# Altium PCB PCB1.PcbDoc
Units mil, origin at the board's own origin, x right, y up, seen from the top; angles counter-clockwise.
Board outline 6000 x 4000 mil, 2 copper layers (Top Layer, Bottom Layer); 53 components, 68 nets, 248 pads, 4 vias.
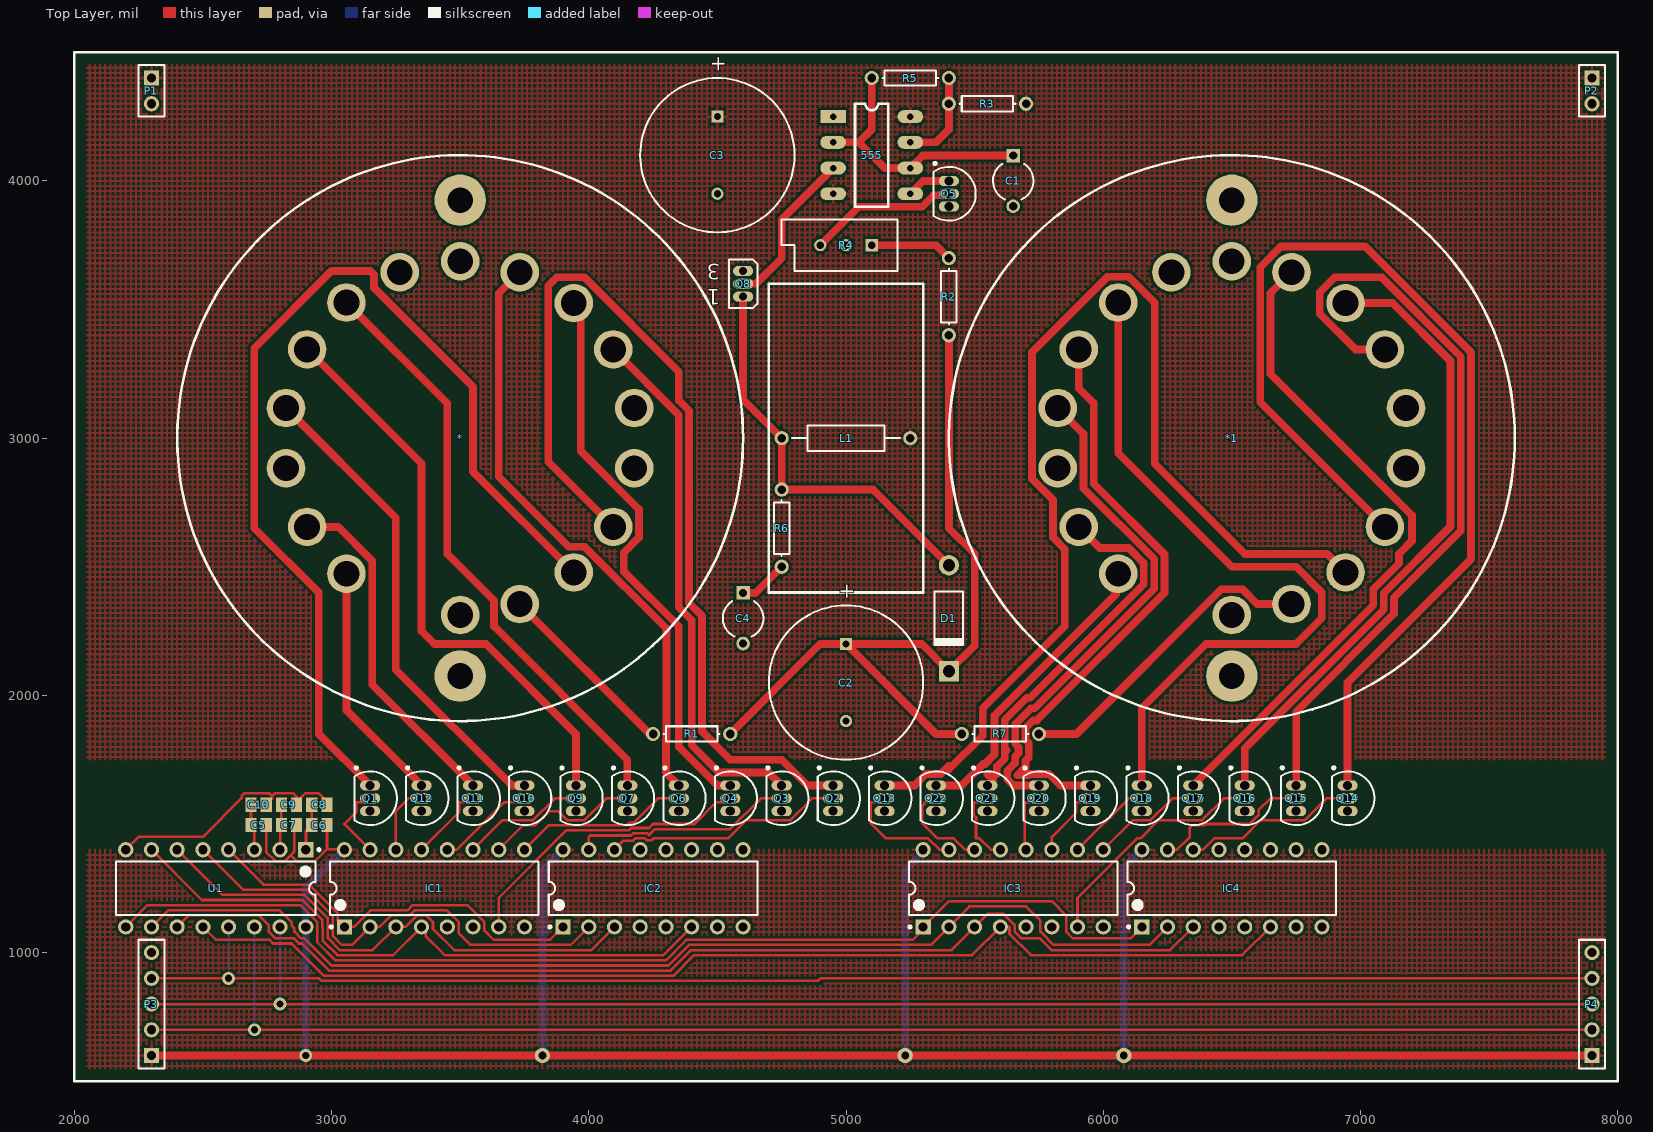
[diagram p0: Top Layer view]
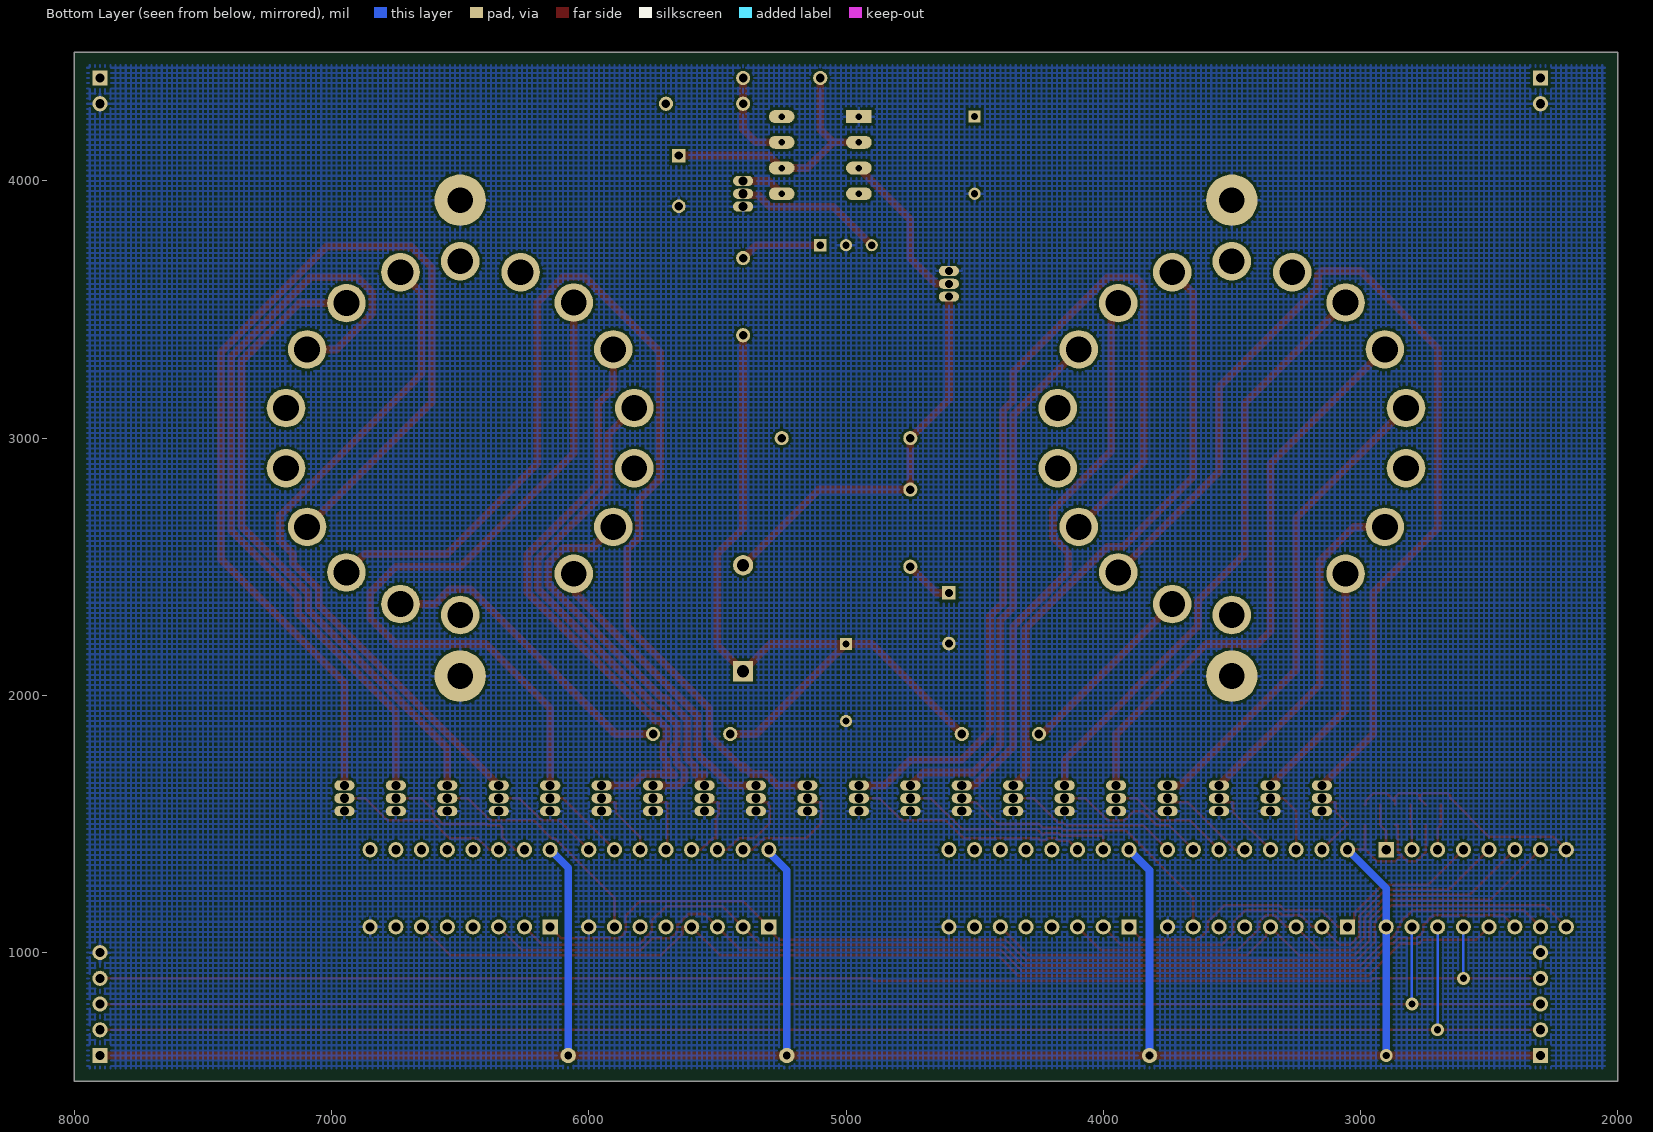
[diagram p1: Bottom Layer view, seen from below]

## Layer stack, top to bottom
Top Solder: solder mask 0.4, Solder Resist, Dk 3.5
Top Layer: signal copper 1.4
Dielectric 1: dielectric 12.6, FR-4, Dk 4.8
Bottom Layer: signal copper 1.4
Bottom Solder: solder mask 0.4, Solder Resist, Dk 3.5

## Board outline
2000,4500 8000,4500 8000,500 2000,500

## Design rules (kind name [scope] priority, off if disabled: settings)
Clearance [All] p1: gap=10 ignorepadtopadclearanceinfootprint=FALSE except(0: Arc-Hole Track-Hole SMDPad-Hole THPad-Hole Via-Hole Fill-Hole Poly-Hole Region-Hole Text-Hole)
PolygonConnect [All] p1: connectstyle=Relief reliefconductorwidth=10 reliefentries=4 polygonreliefangle="90 Angle" airgapwidth=10
RoutingVias [All] p1: holewidth=28 width=50 viastyle="Through Hole" minholewidth=28 minwidth=50 maxholewidth=28 maxwidth=50
SolderMaskExpansion [All] p1: expansion=4
Width [All] p1: maxlimit=30 minlimit=10 preferedwidth=10 minimp=50.000000 maximp=50.000000 favimp=50.000000
30 further rules are at their usual default settings.

## Components (designator, comment, footprint, x,y, rotation, side; value= is the part's Value field where it differs from the comment)
555 "555" 555 4950,4250 r0 top
* "Component_1" B8091 3500,3000 r90 top
*1 "Component_1" B8091 6500,3000 r90 top
C1 "Cap2" CAPR5-4X5 5650,4000 r270 top value=2.2nf
C2 "Cap Pol1" RB7.6-15 5000,2050 r90 top value=100pF
C3 "Cap Pol1" RB7.6-15 4500,4100 r90 top value=100pF
C4 "Cap2" CAPR5-4X5 4600,2300 r270 top value=100pf
C5 "A2+" C0805 2716.54,1496.06 r180 top
C6 "A0+" C0805 2952.76,1496.06 r180 top
C7 "A1+" C0805 2834.65,1496.06 r180 top
C8 "A0-" C0805 2952.76,1574.8 r0 top
C9 "A1-" C0805 2834.65,1574.8 r0 top
C10 "A2-" C0805 2716.54,1574.8 r0 top
D1 "Diode 1N4004" DO-41 5400,2300 r270 top
IC1 "74LS138" DIP-16 3400,1250 r90 top
IC2 "74LS138" DIP-16 4250,1250 r90 top
IC3 "74LS138" DIP-16 5650,1250 r90 top
IC4 "74LS138" DIP-16 6500,1250 r90 top
L1 "Inductor Iron" AXIAL-0.5 5000,3000 r180 top value=10mH
P1 "Header 2" HDR1X2 2300,4400 r270 top
P2 "Header 2" HDR1X2 7900,4400 r270 top
P3 "Header 5" HDR1X5 2300,600 r90 top
P4 "Header 5" HDR1X5 7900,600 r90 top
Q1 "NPN" TO-226-AA 3150,1600 r180 top
Q2 "NPN" TO-226-AA 4950,1600 r180 top
Q3 "NPN" TO-226-AA 4750,1600 r180 top
Q4 "NPN" TO-226-AA 4550,1600 r180 top
Q5 "NPN" TO-226-AA 5400,3950 r180 top
Q6 "NPN" TO-226-AA 4350,1600 r180 top
Q7 "NPN" TO-226-AA 4150,1600 r180 top
Q8 "MOSFET-N" E3 4600,3600 r180 top
Q9 "NPN" TO-226-AA 3950,1600 r180 top
Q10 "NPN" TO-226-AA 3750,1600 r180 top
Q11 "NPN" TO-226-AA 3550,1600 r180 top
Q12 "NPN" TO-226-AA 3350,1600 r180 top
Q13 "NPN" TO-226-AA 5150,1600 r180 top
Q14 "NPN" TO-226-AA 6950,1600 r180 top
Q15 "NPN" TO-226-AA 6750,1600 r180 top
Q16 "NPN" TO-226-AA 6550,1600 r180 top
Q17 "NPN" TO-226-AA 6350,1600 r180 top
Q18 "NPN" TO-226-AA 6150,1600 r180 top
Q19 "NPN" TO-226-AA 5950,1600 r180 top
Q20 "NPN" TO-226-AA 5750,1600 r180 top
Q21 "NPN" TO-226-AA 5550,1600 r180 top
Q22 "NPN" TO-226-AA 5350,1600 r180 top
R1 "Res1" AXIAL-0.3 4400,1850 r0 top value=220k
R2 "Res1" AXIAL-0.3 5400,3550 r270 top value=220k
R3 "Res1" AXIAL-0.3 5550,4300 r0 top value=1K
R4 "RPot" VR5 5000,3750 r180 top value=1K
R5 "Res1" AXIAL-0.3 5250,4400 r0 top value=10K
R6 "Res1" AXIAL-0.3 4750,2650 r90 top value=2k2
R7 "Res1" AXIAL-0.3 5600,1850 r180 top value=220k
U1 "PCF8574N" N0016A 2550,1250 r270 top

## Footprints (in the part's own frame and the unit in brackets; to place one, negate y for a bottom-side part, rotate by r counter-clockwise, add the part's x,y. Pads: shape width x height; smd on the part's side, far side on the other; paste and mask are expansions set on the pad)
555 [mil]
  rect 100x50 hole 25: 1(0,0)
  oval 100x50 hole 25: 2(0,-100) 3(0,-200) 4(0,-300) 5(300,-300) 6(300,-200) 7(300,-100) 8(300,0)
  silkscreen extent 85,-350 215,50
AXIAL-0.3 [mm] "Axial Device, Thru-Hole; 2 Leads; 0.3 in Pin Spacing"
  round 1.4 hole 0.85: 1(-3.81,0) 2(3.81,0)
  silkscreen extent -2.77,-0.76 2.77,0.76
AXIAL-0.5 [mm] "Axial Device, Thru-Hole; 2 Leads; 0.5 in Pin Spacing"
  round 1.4 hole 0.85: 1(-6.35,0) 2(6.35,0)
  silkscreen extent -5.33,-1.27 5.33,1.27
B8091 [mil] "Nixie tube"
  round 150 hole 100: 1(-687.5,0) 2(-645,-232) 3(-522,-442) 4(-345,-595) 5(-117,-677) 6(117,-677) 7(345,-595) 8(525,-442) 9(645,-232) 10(687.5,0) 11(645,235) 12(527,442) 13(345,595) 14(117,677) 15(-117,677) 16(-345,595) 17(-527,442)
  round 200 hole 100: 18(925,0) 19(-925,0)
  silkscreen extent -1100,-1100 1100,1100
C0805 [mm] "Chip Capacitor, Body 2.0x1.3mm, IPC High Density"
  rect 1.1x1.4 smd: 1(-0.75,0) 2(0.75,0)
  body extent -1.1,-0.72 1.1,0.72, height 1.4
CAPR5-4X5 [mm] "Capacitor; 2 Leads"
  rect 1.35x1.35 hole 0.8: 1(-2.5,0)
  round 1.35 hole 0.8: 2(2.5,0)
  silkscreen extent -1.69,-2 1.82,2
DIP-16 [mm] "DIP; 16 Leads; Row Spacing 7.62 mm; Pitch 2.54 mm"
  rect 1.5x1.5 hole 0.9: 1(-3.81,8.89)
  round 1.5 hole 0.9: 2(-3.81,6.35) 3(-3.81,3.81) 4(-3.81,1.27) 5(-3.81,-1.27) 6(-3.81,-3.81) 7(-3.81,-6.35) 8(-3.81,-8.89) 9(3.81,-8.89) 10(3.81,-6.35) 11(3.81,-3.81) 12(3.81,-1.27) 13(3.81,1.27) 14(3.81,3.81) 15(3.81,6.35) 16(3.81,8.89)
  silkscreen extent -3.93,-10.3 2.65,10.31, body extent -3.6,-10.28 3.6,10.28, height 5.08
DO-41 [mm] "Diode, Axial; Body 5.2 x 2.7 mm (LxDia. max), Lead Dia. 0.86 mm (max)"
  round 2 hole 1.2: 1(-5.23,0)
  rect 2x2 hole 1.2: 2(5.23,0)
  silkscreen extent -2.65,-1.4 2.75,1.4
E3 [mm] "TO, Flat Index; 3 In-Line, Axial Leads; Body Dia. 4.6mm; Lead Dia. 0.5 mm (max)"
  oval 2x1 hole 0.8: 1(0,1.27) 2(0,0) 3(0,-1.27)
  silkscreen extent -1.41,-2.41 1.41,2.41
HDR1X2 [mm] "Connector; Header; 2 Position"
  rect 1.5x1.5 hole 0.9: 1(0,0)
  round 1.5 hole 0.9: 2(2.54,0)
  silkscreen extent -1.27,-1.27 3.81,1.27
HDR1X5 [mm] "Connector; Header; 5 Position"
  rect 1.5x1.5 hole 0.9: 1(0,0)
  round 1.5 hole 0.9: 2(2.54,0) 3(5.08,0) 4(7.62,0) 5(10.16,0)
  silkscreen extent -1.27,-1.27 11.43,1.27
N0016A [mm] "DIP, 16-Leads, Body 19.7x6.6mm, Pitch 2.54mm"
  rect 1.5x1.5 hole 0.9: 1(-3.81,8.89)
  round 1.5 hole 0.9: 2(-3.81,6.35) 3(-3.81,3.81) 4(-3.81,1.27) 5(-3.81,-1.27) 6(-3.81,-3.81) 7(-3.81,-6.35) 8(-3.81,-8.89) 9(3.81,-8.89) 10(3.81,-6.35) 11(3.81,-3.81) 12(3.81,-1.27) 13(3.81,1.27) 14(3.81,3.81) 15(3.81,6.35) 16(3.81,8.89)
  silkscreen extent -3.93,-9.85 2.65,10.32, body extent -3.95,-9.85 3.95,9.85, height 5.08
RB7.6-15 [mm] "Polarized Capacitor (Radial); 2 Leads"
  rect 1.2x1.2 hole 0.7: 1(3.81,0)
  round 1.2 hole 0.7: 2(-3.81,0)
  silkscreen extent -7.62,-7.62 7.62,7.62
TO-226-AA [mm] "TO, Flat Index; 3 In-Line, Axial Leads; Body Dia. 4.8mm; Leads 0.55 x 0.51 mm (max)"
  oval 2x1 hole 0.9: 1(0,-1.27) 2(0,0) 3(0,1.27)
  silkscreen extent -2.65,-3.13 1.52,2.65, body extent -2.65,-2.66 1.52,2.66, height 5.33
VR5 [mm] "Thru-Hole; 3 Leads"
  rect 1.2x1.2 hole 0.7: 1(-2.54,0)
  round 1.2 hole 0.7: 2(0,0) 3(2.54,0)
  silkscreen extent -5.08,-2.54 6.35,2.54

## Part data
C1 C4: "Capacitor", PackageDescription="Capacitor; 2 Leads", PackageReference=CAPR5-4X5, Published=23-Sep-2002, Publisher="Altium Limited"
C2 C3: "Polarized Capacitor (Radial)", LatestRevisionDate=17-Jul-2002, LatestRevisionNote="Re-released for DXP Platform.", PackageDescription="Polarized Capacitor (Radial); 2 Leads", PackageReference=RB7.6-15, Published=8-Jun-2000, Publisher="Altium Limited"
C5 C6 C7 C8 C9 C10: library part "Cap Pol3", "Polarized Capacitor (Surface Mount)", LatestRevisionDate=29-May-2009, LatestRevisionNote="IPC-7351 Footprint Added.", PackageDescription="Chip Capacitor", PackageReference=C0805, Published=8-Jun-2000, Publisher="Altium Limited"
D1: "1 Amp General Purpose Rectifier", Code_JEDEC=DO-204-AL, ComponentLink1Description="Manufacturer Link", ComponentLink1URL=http://www.fairchildsemi.com/, ComponentLink2Description=Datasheet, ComponentLink2URL=http://www.fairchildsemi.com/ds/1N%2F1N4001.pdf, DatasheetVersion=1998, LatestRevisionDate=17-Jul-2002, LatestRevisionNote="Re-released for DXP Platform.", PackageDescription="Diode, Axial; Body 5.2 x 2.7 mm (LxDia. max), Lead Dia. 0.86 mm (max)", PackageReference=DO-41, PackageVersion=Aug-1999, Published=8-Jun-2000, Publisher="Altium Limited"
IC1 IC2 IC3 IC4: Package=None, Availability=Unavailable, MF="Texas Instruments", MP=74LS138, Price=None, SnapEDA_Link=https://www.snapeda.com/parts/74LS138/Texas%20Instruments/view-part/?ref=snap
L1: "Magnetic-Core Inductor", LatestRevisionDate=17-Jul-2002, LatestRevisionNote="Re-released for DXP Platform.", PackageDescription="Axial Device, Thru-Hole; 2 Leads; 0.9 in Pin Spacing", PackageReference=AXIAL-0.9, Published=24-Mar-1999, Publisher="Altium Limited"
P1 P2: "Header, 2-Pin", LatestRevisionDate=17-Jul-2002, LatestRevisionNote="Re-released for DXP Platform.", Publisher="Altium Limited"
P3 P4: "Header, 5-Pin", LatestRevisionDate=17-Jul-2002, LatestRevisionNote="Re-released for DXP Platform.", Publisher="Altium Limited"
Q1 Q2 Q3 Q4 Q5 Q6 Q7 Q9 Q10 Q11 Q12 Q13 Q14 Q15 Q16 Q17 Q18 Q19 Q20 Q21 Q22: "NPN Bipolar Transistor", Code_JEDEC=TO-226-AA, LatestRevisionDate=17-Jul-2002, LatestRevisionNote="Re-released for DXP Platform.", PackageDescription="TO, Flat Index; 3 In-Line, Axial Leads; Body Dia. 4.8mm; Leads 0.55 x 0.51 mm (max)", PackageReference=TO-226-AA, Published=8-Jun-2000, Publisher="Altium Limited"
Q8: "N-Channel MOSFET", LatestRevisionDate=17-Jul-2002, LatestRevisionNote="Re-released for DXP Platform.", PackageDescription="TO, Flat Index; 3 In-Line, Axial Leads; Body Dia. 4.6mm; Lead Dia. 0.5 mm (max)", PackageReference=E3, PackageVersion=1995/1996, Published=8-Jun-2000, Publisher="Altium Limited"
R1 R2 R3 R5 R6 R7: "Resistor", LatestRevisionDate=17-Jul-2002, LatestRevisionNote="Re-released for DXP Platform.", PackageDescription="Axial Device, Thru-Hole; 2 Leads; 0.3 in Pin Spacing", PackageReference=AXIAL-0.3, Published=8-Jun-2000, Publisher="Altium Limited"
R4: "Potentiometer", LatestRevisionDate=17-Jul-2002, LatestRevisionNote="Re-released for DXP Platform.", PackageDescription="Variable Resistor, Thru-Hole; 3 Leads", PackageReference=VR5, Published=8-Jun-2000, Publisher="Altium Limited", Set Position=0.5, Sim Note="Enter the Resistance value and the set point into parameter fields."
U1: library part CMP-0314-00016-2, "Remote 8-Bit I/O Expander for I2C-Bus, 2.5 to 6 V, -40 to 85 degC, 16-pin PDIP (N), Pb-Free (RoHS)", Manufacturer="Texas Instruments", Max Frequency(kHz)=100, Voltage Nodes(V)="5, 3.3", # of I/Os=8, Code_JEDEC=MS-001*, ComponentLink1Description=Datasheet, ComponentLink1URL=http://www.ti.com/general/docs/lit/getliterature.tsp?genericPartNumber=PCF8574&fileType=pdf, ComponentLink2Description="Package Specification", ComponentLink2URL=http://www.ti.com/litv/pdf/mpdi002c, DatasheetVersion=SCPS068G, Eco-Plan="Green (RoHS & no Sb/Br)", fSCLK(Max)(MHz)=0.1, I2C Address="0100 xxx", Interrupt Output=Yes, Mounting Technology=Through-hole, PackageDescription="16-Pin Plastic Dual-In-Line Package, Row Spacing 7.62 mm, Pitch 2.54 mm", PackageReference=N0016A, PackageVersion="revE, Dec-2002", PartNumber=PCF8574N, Push-Pull I/O Type=Yes, Reset Input=No, SubFamily="I2C IO Expander", VCC(Max)(V)=6, VCC(Min)(V)=2.5, Vcc range(V)="2.5 to 6.0"

## Free pads (board coordinates)
  round 60 hole 30: 2(3820,600) 3(5230,600) 4(6080,600)

## Via types
v1: diameter 50, hole 28, Top Layer to Bottom Layer, 4 vias

## Nets (pads, with @x,y where several pads share a name; then routed paths per layer and width w, separated by ;. In a path a pad name is that pad's centre, name@x,y a point inside that pad or via, vN(x,y) a via of type N, cw(c..) or ccw(c..) an arc to the next point about the centre after c; other vN are vias at no path point)
00: IC3.15 Q13.2 | length 488.6
  Top Layer w10: Q13.2 5134.69,1584.68 5095.63,1584.68 5095.63,1504.37 5155.47,1444.53 5318.44,1444.53 5362.97,1400 IC3.15
0: IC1.15 Q1.2 | length 305.7
  Top Layer w10: IC1.15 3050,1500 3095.63,1545.63 3095.63,1584.68 3134.68,1584.68 Q1.2
1: IC1.14 Q12.2 | length 270.7
  Top Layer w10: IC1.14 3250,1550 3300,1600 Q12.2
2: IC1.13 Q11.2 | length 305.7
  Top Layer w10: IC1.13 3495.63,1545.63 3495.63,1584.68 3534.68,1584.68 Q11.2
3: IC1.12 Q10.2 | length 382.8
  Top Layer w10: IC1.12 3487.03,1400 3671.71,1584.68 3734.68,1584.68 Q10.2
4: IC1.11 Q9.2 | length 482.8
  Top Layer w10: IC1.11 3665.32,1515.32 3784.05,1515.32 3868.74,1600 Q9.2
5: IC1.10 Q7.2 | length 611.6
  Top Layer w10: IC1.10 3745.32,1495.32 3792.34,1495.32 3847.02,1550 3881.26,1550 3915.95,1515.32 3984.05,1515.32 4068.74,1600 Q7.2
5V: C5.1 C6.1 C7.1 IC1.16 IC2.16 IC3.16 IC4.16 P3.1 P4.1 pad.2 pad.3 pad.4 U1.16 | length 9643.4
  Top Layer w10: C5.1 2746.06,1390.97 2781.56,1355.47 2818.44,1355.47 2842.97,1380 ; C7.1 2855.47,1496.06 2855.47,1392.5 2842.97,1380 ; C6.1 2982.28,1402.28 ; IC1.16 3047.72,1402.28 2982.28,1402.28 ; 2842.97,1380 2842.97,1376.76 2864.26,1355.47 2935.74,1355.47 2944.53,1364.26 2944.53,1364.53 2982.28,1402.28
  Top Layer w30: P3.1 v1(2900,600) pad.2 pad.3 pad.4 P4.1
  Bottom Layer w10: IC3.16@5300,1390 IC3.16
  Bottom Layer w30: v1(2900,600) U1.16 2900,1250 IC1.16 ; pad.2 3820,1320 IC2.16 ; pad.3 5230,1320 IC3.16@5300,1390 ; pad.4 6080,1330 IC4.16
6: IC1.9 Q6.2 | length 682.8
  Top Layer w10: IC1.9 3845.32,1495.32 4147.49,1495.32 4156.7,1504.53 4173.26,1504.53 4268.74,1600 Q6.2
7: IC1.7 Q4.2 | length 1173.3
  Top Layer w10: IC1.7 3650,1212.97 3912.34,1475.32 4155.78,1475.32 4164.99,1484.53 4234.53,1484.53 4250,1500 4410.94,1500 4495.63,1584.68 4534.69,1584.68 Q4.2
8: IC2.15 Q3.2 | length 868.8
  Top Layer w10: IC2.15 4000,1450 4005.32,1455.32 4164.06,1455.32 4173.27,1464.53 4226.73,1464.53 4234.77,1456.49 4258.28,1480 4548.74,1480 4668.74,1600 Q3.2
9: IC2.14 Q2.2 | length 939.5
  Top Layer w10: IC2.14 4135.31,1435.32 4172.34,1435.32 4181.56,1444.53 4218.44,1444.53 4226.49,1436.49 4243.05,1436.49 4251.1,1444.53 4541.55,1444.53 4612.34,1515.32 4784.05,1515.32 4868.74,1600 Q2.2
10: IC3.14 Q22.2 | length 383.5
  Top Layer w10: Q22.2 5334.69,1584.68 5304.37,1584.68 5304.37,1577.48 5295.63,1568.74 5295.63,1504.37 5355.47,1444.53 5418.44,1444.53 5462.97,1400 IC3.14
20: IC3.13 Q21.2 | length 317.9
  Top Layer w10: Q21.2 5534.69,1584.68 5495.63,1584.68 5495.63,1535.63 5505.47,1525.79 5505.47,1444.53 5518.44,1444.53 5562.97,1400 IC3.13
30: IC3.12 Q20.2 | length 247.2
  Top Layer w10: IC3.12 5695.63,1404.37 5695.63,1584.68 5734.69,1584.68 Q20.2
40: IC3.11 Q19.2 | length 285
  Top Layer w10: IC3.11 5800,1450 5895.63,1545.63 5895.63,1584.68 5934.69,1584.68 Q19.2
50: IC3.10 Q18.2 | length 332.8
  Top Layer w10: IC3.10 6100,1600 Q18.2
60: IC3.9 Q17.2 | length 432.8
  Top Layer w10: IC3.9 6115.31,1515.32 6184.05,1515.32 6268.74,1600 Q17.2
70: IC3.7 Q16.2 | length 923.3
  Top Layer w10: IC3.7 5900,1212.97 6131.56,1444.53 6144.53,1444.53 6215.31,1515.32 6384.05,1515.32 6468.74,1600 Q16.2
80: IC4.15 Q15.2 | length 615.5
  Top Layer w10: IC4.15 6287.03,1400 6337.03,1450 6337.03,1487.03 6345.31,1495.32 6392.34,1495.32 6397.02,1500 6568.74,1500 6604.37,1535.63 6604.37,1554.37 6650,1600 Q15.2
90: IC4.14 Q14.2 | length 682.8
  Top Layer w10: IC4.14 6387.03,1400 6431.56,1444.53 6541.55,1444.53 6612.34,1515.32 6784.05,1515.32 6868.74,1600 Q14.2
A0: IC1.1 IC2.1 U1.4 | length 1570.3
  Top Layer w10: U1.4 2735.47,1264.53 2911.58,1264.53 3024.53,1151.58 3024.53,1125.47 IC1.1 3087.03,1100 3151.56,1164.53 3294.99,1164.53 3314.99,1184.53 3528.44,1184.53 3594.53,1118.44 3594.53,1085.47 3630,1050 3850,1050 IC2.1
A1: IC1.2 IC2.2 U1.5 | length 1864.9
  Top Layer w10: U1.5 2655.47,1244.53 2903.3,1244.53 3004.53,1143.3 3004.53,1115.47 3005.47,1114.53 3005.47,1064.26 3039.73,1030 3080,1030 IC1.2 3187.03,1100 3231.56,1144.53 3303.27,1144.53 3323.27,1164.53 3448.44,1164.53 3494.53,1118.44 3494.53,1081.56 3494.23,1081.25 3494.23,1075.77 3540,1030 3930,1030 IC2.2
A2: IC1.3 IC2.3 U1.6 | length 2071.2
  Top Layer w10: U1.6 2575.47,1224.53 2895.01,1224.53 2984.53,1135.01 2984.53,1107.19 2985.47,1106.24 2985.47,1055.97 3031.45,1010 3160,1010 IC1.3 3287.03,1100 3331.56,1144.53 3368.44,1144.53 3394.53,1118.44 3394.53,1092.5 3477.03,1010 4010,1010 IC2.3
A3: IC1.4 IC2.6 U1.7 | length 2464
  Top Layer w10: U1.7 2495.47,1204.53 2886.73,1204.53 2964.53,1126.73 2964.53,1098.9 2965.47,1097.96 2965.47,1047.69 3023.16,990 3240,990 IC1.4 3365.47,1084.53 3365.47,1064.99 3430.46,1000 3430.46,999.54 3440,990 4290,990 IC2.6
A4: IC3.1 IC4.1 U1.9 | length 4335.9
  Top Layer w10: U1.9 2284.53,1184.53 2878.44,1184.53 2944.53,1118.44 2944.53,1040.35 3014.88,970 4300,970 4380,1050 5260,1050 5300,1090 IC3.1 5400,1200 5800,1200 5855.47,1144.53 5855.47,1081.56 5881.56,1055.47 6105.47,1055.47 IC4.1
A5: IC3.2 IC4.2 U1.10 | length 4292.4
  Top Layer w10: U1.10 2364.53,1164.53 2798.44,1164.53 2844.53,1118.44 2844.53,1105.47 2855.47,1094.53 2855.47,1081.56 2881.56,1055.47 2894.53,1055.47 3000,950 4310,950 4390,1030 5330,1030 IC3.2 5480,1180 5700,1180 5755.47,1124.53 5755.47,1081.56 5807.03,1030 6180,1030 IC4.2
A6: IC3.3 IC4.3 U1.11 | length 4274.1
  Top Layer w10: U1.11 2444.53,1144.53 2718.44,1144.53 2755.47,1107.5 2755.47,1081.56 2781.56,1055.47 2853.27,1055.47 2873.27,1035.47 2884.53,1035.47 2990,930 4318.28,930 4398.28,1010 5410,1010 IC3.3 5550,1150 5612.97,1150 5655.47,1107.5 5655.47,1081.56 5681.56,1055.47 5753.27,1055.47 5798.74,1010 6260,1010 IC4.3
A7: IC3.4 IC4.6 U1.12 | length 4413.7
  Top Layer w10: U1.12 2550,1050 2758.74,1050 2773.27,1035.47 2844.53,1035.47 2970,910 4330,910 4410,990 5490,990 IC3.4 5634.69,1100 5635.47,1099.21 5635.47,1073.27 5718.74,990 6540,990 IC4.6
adj: Q5.2 R4.3 | length 582.8
  Top Layer w30: R4.3 5050,3900 5295.71,3900 5340.4,3944.68 5394.69,3944.68 Q5.2
GND: 555.1 *1.18 *1.19 *.18 *.19 C1.2 C2.2 C3.2 C4.2 C8.2 C9.2 C10.2 IC1.8 IC2.8 IC3.8 IC4.8 P1.2 P2.2 P3.5 P4.5 Q1.3 Q2.3 Q3.3 Q4.3 Q5.3 Q6.3 Q7.3 Q8.3 Q9.3 Q10.3 Q11.3 Q12.3 Q13.3 Q14.3 Q15.3 Q16.3 Q17.3 Q18.3 Q19.3 Q20.3 Q21.3 Q22.3 R4.2 U1.8 | length 1007.9
  Top Layer w10: U1.8 2250,1450 2500,1450 2650.35,1600.35 2650.35,1608.58 2661.78,1620 2757.04,1620 2768.46,1608.58 ; C10.2 2768.46,1597.2 2768.46,1608.58 ; C9.2 C9.2@2864.17,1586.17 ; C8.2 2980,1577.09 2980,1590 2950,1620 2898,1620 C9.2@2864.17,1586.17 ; 2768.46,1608.58 2779.89,1620 2850,1620 2864.17,1605.83 C9.2@2864.17,1586.17
ind: D1.1 L1.2 Q8.1 R6.2 | length 1583.9
  Top Layer w30: Q8.1 4600,3150 L1.2 R6.2 5105.91,2800 D1.1
INT: P3.4 P4.4 U1.13 | length 5808.3
  Top Layer w10: P3.4 v1(2600,900) 2951.72,900 2961.72,890 4890,890 4900,900 P4.4
  Bottom Layer w10: v1(2600,900) U1.13
Net555_2: 555.2 555.6 C1.1 R5.1 | length 1032.2
  Top Layer w30: 555.2 5050,4150 ; R5.1 5100,4200 5050,4150 ; C1.1 5298.43,4098.43 555.6 5150,4050 5050,4150
Net555_3: 555.3 Q8.2 | length 624.3
  Top Layer w30: Q8.2 4650,3600 4750,3700 4750,3850 555.3
Net555_5: 555.5 Q5.1 | length 170.7
  Top Layer w30: 555.5 5300,4000 Q5.1
Net555_7: 555.7 R3.1 R5.2 | length 370.7
  Top Layer w30: 555.7 5350,4150 5400,4200 R3.1 R5.2
Net*1_2: *1.2 R7.1 | length 1238.8
  Top Layer w30: R7.1 5896.08,1850 6458.58,2412.5 6541.42,2412.5 6598.92,2355 *1.2
Net*1_3: *1.3 Q13.1 | length 4338.8
  Top Layer w30: Q13.1 5267.12,1650 5311.81,1694.68 5368.41,1694.68 5400,1726.28 5400,1712.5 5531.25,1843.75 5531.25,1950 5850,2268.75 5850,2568.58 5805,2613.58 5805,2759.58 5723,2841.58 5723,3333.42 6016.58,3627 6099.42,3627 6200,3526.42 6200,2900 6550,2550 6870,2550 *1.3
Net*1_4: *1.4 Q14.1 | length 4116.3
  Top Layer w30: Q14.1 6950,2050 7430,2530 7430,3333.14 7018.14,3745 6690.58,3745 6610,3664.42 6610,3140 *1.4
Net*1_7: *1.7 Q15.1 | length 3024.9
  Top Layer w30: Q15.1 6750,1936.86 7130,2316.86 7130,2380 7390,2640 7390,3316.57 7081.57,3625 6900.58,3625 6842,3566.42 6842,3483.58 6980.58,3345 *1.7
Net*1_8: *1.8 Q16.1 | length 2482.6
  Top Layer w30: Q16.1 6550,1793.43 7090,2333.43 7090,2396.57 7350,2656.57 7350,3300 7125,3525 *1.8
Net*1_9: *1.9 Q17.1 | length 2608.9
  Top Layer w30: Q17.1 7050,2350 7050,2413.14 7150,2513.14 7150,2550 7200,2600 7200,2700 6650,3250 6650,3563 *1.9
Net*1_12: *1.12 Q18.1 | length 2846.5
  Top Layer w30: *1.12 6058,2942 6500,2500 6750,2500 6850,2400 6850,2300 6750,2200 6400,2200 6150,1950 Q18.1
Net*1_13: *1.13 Q19.1 | length 2352.3
  Top Layer w30: *1.13 5905,3194.42 5963,3136.42 5963,2822.56 6238,2547.56 6238,2398.44 5742.12,1902.56 5728.23,1902.56 5697.44,1871.77 5697.44,1828.23 5710.28,1815.39 5710.28,1758.83 5697.44,1745.99 5697.44,1720.87 5666.57,1690 5707.12,1690 5711.81,1694.68 5788.19,1694.68 5832.88,1650 Q19.1
Net*1_14: *1.14 Q20.1 | length 1987.5
  Top Layer w30: Q20.1 5650,1650 5626.57,1673.43 5626.57,1706.57 5657.44,1737.44 5657.44,1762.56 5670.28,1775.39 5670.28,1798.83 5657.44,1811.66 5657.44,1888.34 5719.42,1950.32 5733.31,1950.32 6198,2415.01 6198,2530.99 5923,2805.99 5923,3017 *1.14
Net*1_16: *1.16 Q21.1 | length 1497.6
  Top Layer w30: Q21.1 5571.72,1671.72 5550,1693.43 5586.57,1693.43 5586.57,1723.14 5617.44,1754.01 5617.44,1779.13 ; *1.16 5987,2573 6099.42,2573 6158,2514.42 6158,2431.58 5716.74,1990.32 5702.85,1990.32 5617.44,1904.91 5617.44,1795.09 ; 5617.44,1779.13 5617.44,1795.09 ; 5617.44,1779.13 5625.42,1787.11 5617.44,1795.09
Net*1_17: *1.17 Q22.1 | length 1233.8
  Top Layer w30: Q22.1 5450,1650 5533.43,1733.43 5540.29,1733.43 5577.44,1770.58 5577.44,1921.48 6050,2394.04 *1.17@6050,2413 ; *1.17@6036.73,2413 *1.17@6050,2413 ; *1.17@6050,2450 *1.17@6050,2413 ; *1.17 6058,2413 *1.17@6050,2413
Net*_2: *.2 R1.1 | length 727.2
  Top Layer w30: *.2 4237,1850 R1.1
Net*_3: *.3 Q1.1 | length 3960.7
  Top Layer w30: Q1.1 2950,1850 2950,2400 2700,2650 2700,3350 3000,3650 3150,3650 3165,3635 3165,3585 3550,3200 3550,2870 *.3
Net*_4: *.4 Q2.1 | length 3748
  Top Layer w30: *.4 3842,2908 3842,3592 3875,3625 3983.42,3625 4350,3258.42 4350,3146.57 4390,3106.57 4390,2358.85 4440,2308.85 4440,1860 4550,1750 4750,1750 4850,1650 Q2.1
Net*_7: *.7 Q3.1 | length 2079.6
  Top Layer w30: *.7 4350,3090 4350,2342.28 4400,2292.28 4400,1806.57 4506.57,1700 4700,1700 Q3.1
Net*_8: *.8 Q4.1 | length 2204.7
  Top Layer w30: *.8 3968.58,3498.42 3968.58,2950 4195,2723.58 4195,2613.58 4136.42,2555 4136.42,2481.57 4350,2267.99 4350,1800 4500,1650 Q4.1
Net*_9: *.9 Q6.1 | length 2357
  Top Layer w30: *.9 3650,3563 3650,2850 3922,2578 3983.42,2578 4302.56,2258.86 4302.56,1828.23 4300,1825.67 4300,1700 Q6.1
Net*_12: *.12 Q7.1 | length 2329.3
  Top Layer w30: *.12 3450,3135 3450,2550 3632,2368 3632,2268 4150,1750 Q7.1
Net*_13: *.13 Q9.1 | length 2245
  Top Layer w30: *.13 3350,2900 3350,2250 3400,2200 3600,2200 3950,1850 Q9.1
Net*_14: *.14 Q10.1 | length 1880.3
  Top Layer w30: *.14 3250,2690 3250,2100 3700,1650 Q10.1
Net*_16: *.16 Q11.1 | length 1342.7
  Top Layer w30: *.16 3025.42,2655 3158,2522.42 3158,2042 Q11.1
Net*_17: *.17 Q12.1 | length 944
  Top Layer w30: *.17 3058,1942 Q12.1
NetC4_1: C4.1 R6.1 | length 192.1
  Top Layer w30: C4.1 4648.43,2398.43 R6.1
NetC5_2: C5.2 C10.1 U1.3 | length 180.2
  Top Layer w10: C10.1 C5.2 2700,1483.07 U1.3
NetC6_2: C6.2 C8.1 U1.1 | length 184.4
  Top Layer w10: U1.1 2900.83,1400.83 2900.83,1473.66 C6.2 C8.1
NetC7_2: C7.2 C9.1 U1.2 | length 176.9
  Top Layer w10: U1.2 2800,1490.94 C7.2 C9.1
NetR2_1: R2.1 R4.1 | length 320.7
  Top Layer w30: R4.1 5350,3750 R2.1
out: C2.1 D1.2 R1.2 R2.2 R7.2 | length 3022.6
  Top Layer w30: R1.2 4900,2200 C2.1 ; R2.2 5400,2650 5500,2550 5500,2194.09 D1.2 5294.09,2200 C2.1 ; R7.2 5350,1850 C2.1
SCL: P3.2 P4.2 U1.14 | length 6000
  Top Layer w10: P3.2 v1(2700,700) P4.2
  Bottom Layer w10: v1(2700,700) U1.14
SDA: P3.3 P4.3 U1.15 | length 5900
  Top Layer w10: P3.3 v1(2800,800) P4.3
  Bottom Layer w10: v1(2800,800) U1.15
VCC: 555.4 555.8 C3.1 L1.1 P1.1 P2.1 R3.2
pads on no net: *1.1 *1.5 *1.6 *1.10 *1.11 *1.15 *.1 *.5 *.6 *.10 *.11 *.15 IC1.5 IC1.6 IC2.4 IC2.5 IC2.7 IC2.9 IC2.10 IC2.11 IC2.12 IC2.13 IC3.5 IC3.6 IC4.4 IC4.5 IC4.7 IC4.9 IC4.10 IC4.11 IC4.12 IC4.13

## Polygon pours and split planes (outlines as drawn)
GND on Bottom Layer "Top Layer-GND" (hatched 90Degree grid 20 track 8, remove dead copper, pour order 0): 2050,4450 7950,4450 7950,550 2050,550
VCC on Top Layer "Top Layer-GND" (hatched 90Degree grid 20 track 8, remove dead copper, pour order 4): 2050,4450 7950,4450 7950,1750 2050,1750
5V on Top Layer "Top Layer-GND" (hatched 90Degree grid 20 track 8, remove dead copper, pour order 2): 2050,550 2050,1400 7950,1400 7950,550

## Silkscreen, mask and mechanical layers (free items; w line width, h text height)
Top Overlay:
  lines w10: 2000,500 2000,4500 8000,4500 8000,500 2000,500 ; 4700,2400 5300,2400 5300,3600 5000,3600 4700,3600 4700,2400

## Text inside footprints (layer, text, board x,y; h text height)
C2: Top Overlay "+" at 5029.01,2370.15 h59.06 r90
C3: Top Overlay "+" at 4529.01,4420.15 h59.06 r90
Q8: Top Overlay "1" at 4510.43,3578.15 h59.05 r180; Top Overlay "3" at 4510.43,3677.28 h59.05 r180